# EAGLE board FPGA (EAGLE 9.1.3)

Size 277.93 x 208.33 mm. Coordinates in mm from the lower left corner, seen from the top.
Outline: 3.66,200.32 11.66,200.32 11.66,208.32
Outline: 82.18,208.32 82.18,200.32 90.18,200.32 90.18,208.32 95.75,208.32
Outline: 0,63.06 4.01,69.99
Outline: 10.93,65.99 6.93,59.06
Outline: 240.1,156.59 144.8,156.59
Outline: 144.8,156.59 240.1,156.59
Outline: 240.1,156.59 144.8,156.59
Outline: 240.1,156.59 arc-292 144.8,156.59
Copper layers (1+2*15+16): Top 0.035mm / dielectric 0.3mm / Route2 0.09mm / dielectric 0.7mm / Route15 0.09mm / dielectric 0.3mm / Bottom 0.035mm
Design rules "default *": minimum track width 6mil, minimum drill 0.35mm, track to track 6mil, track to pad 6mil, pad to pad 6mil, via to via 6mil, smd to smd 6mil, copper to edge 40mil, drill to drill 6mil, minimum pad ring 10mil, minimum via ring 8mil, stop-mask expansion 4mil, vias tented up to drill 0mil, thermal gap 10mil
Net classes: 0 signal1: width 0.3 mm, drill 0.4 mm, clearance 0.2 mm; 1 5v: width 0.4 mm, drill 0.4 mm, clearance 0.2 mm; 2 18V: width 1.2 mm, drill 1.3 mm, clearance 0.2 mm; 3 signal: width 0.3 mm, drill 0.4 mm, clearance 0.2 mm; 4 gnd: width 0.3 mm, drill 0.4 mm, clearance 0.2 mm; 5 VCKT: width 4 mm, drill 4 mm, clearance 0.2 mm; 6 motor: width 0.8 mm, drill 1 mm, clearance 0.2 mm
Holes 3.2 mm at -24.96,94.83 26.41,57.03 67.09,57.03 118.8,94.83 -8.97,197.69 -24.96,177.83 102.81,197.69 118.8,177.83

## Footprints (pad centres in the part's own frame; a part is rotated, then mirrored left to right if it is on the bottom)
C1206 = smd 1.6 x 1.8: 1 -1.4,0; 2 1.4,0
TO220H = drill 1.118 long: 1 -2.54,-10.16; 2 0,-10.16; 3 2.54,-10.16 | hole 3.302: 0,4.826
2X5-SHROUDED_LOCK = drill 1.016 pad 1.88: 1 -1.397,5.08; 2 1.397,5.08; 3 -1.397,2.54; 4 1.397,2.54; 5 -1.397,0; 6 1.397,0; 7 -1.397,-2.54; 8 1.397,-2.54; 9 -1.397,-5.08; 10 1.397,-5.08
XT-60 = drill 4.7 square: BATT 0,4.154; GND 0,11.092
2X20 = drill 1.016 octagon: 1 -24.13,-1.27; 2 -24.13,1.27; 3 -21.59,-1.27; 4 -21.59,1.27; 5 -19.05,-1.27; 6 -19.05,1.27; 7 -16.51,-1.27; 8 -16.51,1.27; 9 -13.97,-1.27; 10 -13.97,1.27; 11 -11.43,-1.27; 12 -11.43,1.27; 13 -8.89,-1.27; 14 -8.89,1.27; 15 -6.35,-1.27; 16 -6.35,1.27; 17 -3.81,-1.27; 18 -3.81,1.27; 19 -1.27,-1.27; 20 -1.27,1.27; 21 1.27,-1.27; 22 1.27,1.27; 23 3.81,-1.27; 24 3.81,1.27; 25 6.35,-1.27; 26 6.35,1.27; 27 8.89,-1.27; 28 8.89,1.27; 29 11.43,-1.27; 30 11.43,1.27; 31 13.97,-1.27; 32 13.97,1.27; 33 16.51,-1.27; 34 16.51,1.27; 35 19.05,-1.27; 36 19.05,1.27; 37 21.59,-1.27; 38 21.59,1.27; 39 24.13,-1.27; 40 24.13,1.27
1206 = smd 1.6 x 1.803: A -1.422,0; C 1.422,0
R1206 = smd 1.6 x 1.803: 1 -1.422,0; 2 1.422,0
MA08-1 = drill 1.016 long: 1 -8.89,0; 2 -6.35,0; 3 -3.81,0; 4 -1.27,0; 5 1.27,0; 6 3.81,0; 7 6.35,0; 8 8.89,0
MA10-1 = drill 1.016 long: 1 -11.43,0; 2 -8.89,0; 3 -6.35,0; 4 -3.81,0; 5 -1.27,0; 6 1.27,0; 7 3.81,0; 8 6.35,0; 9 8.89,0; 10 11.43,0
TO228P1042X238-3N = smd 0.889 x 1.219: 1 -2.286,-6.502; 3 2.286,-6.502 | smd 6.731 x 6.502: 2 0,0.152
NODEMCU32 = drill 0.8 long: P$1 0,0; P$2 0,-2.54; P$3 0,-5.08; P$4 0,-7.62; P$5 0,-10.16; P$6 0,-12.7; P$7 0,-15.24; P$8 0,-17.78; P$9 0,-20.32; P$10 0,-22.86; P$11 0,-25.4; P$12 0,-27.94; P$13 0,-30.48; P$14 0,-33.02; P$15 0,-35.56; P$16 0,-38.1; P$17 0,-40.64; P$18 0,-43.18; P$19 0,-45.72; P$20 22.86,0; P$21 22.86,-2.54; P$22 22.86,-5.08; P$23 22.86,-7.62; P$24 22.86,-10.16; P$25 22.86,-12.7; P$26 22.86,-15.24; P$27 22.86,-17.78; P$28 22.86,-20.32; P$29 22.86,-22.86; P$30 22.86,-25.4; P$31 22.86,-27.94; P$32 22.86,-30.48; P$33 22.86,-33.02; P$34 22.86,-35.56; P$35 22.86,-38.1; P$36 22.86,-40.64; P$37 22.86,-43.18; P$38 22.86,-45.72
BUCK = drill 1.016 pad 1.778 octagon: GND 0,0; GNDO 39,0; VIN 0,17.5; VOUT 39,17.5
DA10 = drill 5.08 pad 5.334 long: P$1 0,0; P$2 -7.048,0

## Placement (x,y rotation side)
C1  47uF  [C1206]  519.29,-239.57 90 top  (outside the outline)
C3  47uF  [C1206]  521.83,-245.92 180 top  (outside the outline)
C4  47uF  [C1206]  521.83,-257.35 180 top  (outside the outline)
C5  47uF  [C1206]  525.64,-231.95 180 top  (outside the outline)
IC1  7805T  [TO220H]  537.07,-252.27 90 bottom  (outside the outline)
IC2  7805T  [TO220H]  537.07,-238.3 90 bottom  (outside the outline)
J1  [2X5-SHROUDED_LOCK]  142.45,85.59 90 bottom
J2  [2X5-SHROUDED_LOCK]  242.45,85.59 90 bottom
J3  [2X5-SHROUDED_LOCK]  152.45,25.59 90 bottom
J4  [2X5-SHROUDED_LOCK]  232.45,25.59 90 bottom
J5  XT-60BATT_LABEL  [XT-60]  159.06,149.47 270 bottom
JP1  [2X20]  165.27,77.59 270 top
JP2  [2X20]  219.63,77.59 270 top
LED1  [1206]  -24.28,-300.46 0 top  (outside the outline)
LED2  [1206]  -24.28,-304.58 0 top  (outside the outline)
LED3  [1206]  -24.28,-312.82 0 top  (outside the outline)
LED4  [1206]  -24.28,-321.06 0 top  (outside the outline)
LED5  [1206]  -24.28,-329.3 0 top  (outside the outline)
LED6  [1206]  -24.28,-337.54 0 top  (outside the outline)
LED7  [1206]  -24.28,-345.78 0 top  (outside the outline)
R1  [R1206]  -24.11,-296.34 0 top  (outside the outline)
R2  [R1206]  -24.11,-308.7 0 top  (outside the outline)
R3  [R1206]  -24.11,-316.94 0 top  (outside the outline)
R4  [R1206]  -24.11,-325.18 0 top  (outside the outline)
R5  [R1206]  -24.11,-333.42 0 top  (outside the outline)
R6  [R1206]  -24.11,-341.66 0 top  (outside the outline)
R7  [R1206]  -24.11,-349.9 0 top  (outside the outline)
SV1  [MA08-1]  142.45,94.59 0 bottom
SV2  [MA08-1]  152.45,34.59 0 bottom
SV3  [MA08-1]  242.45,94.59 0 bottom
SV4  [MA08-1]  232.45,34.59 0 bottom
SV5  [MA08-1]  192.45,15.59 0 bottom
SV7  [MA08-1]  142.45,130.59 180 top
SV8  [MA10-1]  142.45,104.59 180 top
SV9  [MA08-1]  242.45,70.59 180 top
SV10  [MA10-1]  242.45,44.59 180 top
SV11  [MA08-1]  142.45,70.59 180 top
SV12  [MA10-1]  142.45,44.59 180 top
SV14  [MA10-1]  192.45,106.59 180 top
SV15  [MA08-1]  242.45,130.59 180 top
SV16  [MA10-1]  242.45,104.59 180 top
SV17  [MA08-1]  192.45,132.59 180 top
SV18  [MA08-1]  212.75,120.16 90 bottom
U1  [TO228P1042X238-3N]  184.9,143.01 180 top
U2  [TO228P1042X238-3N]  176.52,143.16 180 top
U3  [TO228P1042X238-3N]  168.34,143.27 180 top
U$1  NODEMCU32S  [NODEMCU32]  203.95,88.1 0 bottom
U$4  BUCK  [BUCK]  56.31,146.43 0 top
U$5  [DA10]  -16.41,-286.67 0 top  (outside the outline)

## Library data of the parts
C1 C3-C5 = rcl
IC1 IC2 = linear
J1-J4 = SparkFun-Connectors; PROD_ID: CONN-08671; SF_ID: PRT-08506
J5 = RoboJackets-Connectors
JP1 JP2 = pinhead
LED1-LED7 = led
R1-R7 = resistor
SV1-SV5 SV7-SV12 SV14-SV18 = con-lstb; OC_FARNELL: unknown; OC_NEWARK: unknown
U1-U3 = LP38690DT-3.3; MPN: LP38690DT-3.3; OC_FARNELL: 1008048; OC_NEWARK: 41K7439; PACKAGE: TO-252; SUPPLIER: National Semiconductor
U$1 = nodeMCU
U$4 = BUCK
U$5 = switch_DA10

## Nets
5V [5v]: C3.1 IC1.3 J1.2 J2.2 J3.2 J4.2 R2.1 SV1.5 SV2.5 SV3.5 SV4.5 SV17.1 SV18.5
5V1: C5.1 IC2.3 R1.1 SV7.1 SV9.1 SV11.1 SV15.1 U$1.P$20
12V: C1.1 C4.1 IC1.1 IC2.1 R4.1 SV14.9 SV14.10 U$4.VOUT
18V [18V]: R3.1 SV8.9 SV8.10 SV10.9 SV10.10 SV12.9 SV12.10 SV16.9 SV16.10 U1.2 U2.2 U3.2 U$4.VIN
CHARGE: JP2.16 SV5.1
DONE: JP2.18 SV5.2
ESP_EN: JP2.25 U$1.P$37
ESP_REC: R7.1 U$1.P$33
ESP_RX: JP2.21 U$1.P$15
ESP_TRANS: R6.1 U$1.P$34
ESP_TX: JP2.23 U$1.P$16
FPGA_REC: JP1.22 R5.1
GND [gnd]: C1.2 C3.2 C4.2 C5.2 IC1.2 IC2.2 J1.3 J2.3 J3.3 J4.3 J5.GND JP1.1 JP1.39 JP2.2 JP2.40 LED1.C LED2.C LED3.C LED4.C LED5.C LED6.C LED7.C SV1.4 SV2.4 SV3.4 SV4.4 SV5.8 SV8.1 SV8.2 SV10.1 SV10.2 SV12.1 SV12.2 SV14.1 SV14.2 SV16.1 SV16.2 SV18.4 U$1.P$13 U$1.P$19 U$1.P$21 U$1.P$25 U$4.GND U$4.GNDO
INPUT [VCKT]: U1.1 U1.3 U2.1 U2.3 U3.1 U3.3 U$5.P$1
IR1: JP2.24 SV5.7
IR2: JP2.26 SV5.6
IR3 [gnd]: JP2.15 SV5.5
KICK: JP2.20 SV5.4
KICK_CHIP: JP2.22 SV5.3
M1ACS_OUT: SV7.8
M1EA: J1.6 JP1.4
M1EB: J1.8 JP1.6
M1H1: JP1.8 SV1.3
M1H2: JP1.10 SV1.2
M1H3: JP1.12 SV1.1
M2ACS_OUT: SV11.8
M2EA: J2.6 JP1.30
M2EB: J2.8 JP1.32
M2H1: JP1.34 SV2.3
M2H2: JP1.36 SV2.2
M2H3: JP1.38 SV2.1
M3ACS_OUT: SV15.8
M3EA: J3.6 JP2.3
M3EB: J3.8 JP2.5
M3H1: JP2.7 SV3.3
M3H2: JP2.9 SV3.2
M3H3: JP2.11 SV3.1
M4ACS_OUT: SV9.8
M4EA: J4.6 JP2.29
M4EB: J4.8 JP2.31
M4H1: JP2.33 SV4.3
M4H2: JP2.35 SV4.2
M4H3: JP2.37 SV4.1
M11: SV1.8 SV7.6 SV7.7
M11A [signal]: JP1.3 SV8.8
M11B [signal]: JP1.5 SV8.7
M12: SV1.7 SV7.4 SV7.5
M12A: JP1.7 SV8.6
M12B: JP1.9 SV8.5
M13: SV1.6 SV7.2 SV7.3
M13A: JP1.11 SV8.4
M13B: JP1.13 SV8.3
M21: SV2.8 SV11.6 SV11.7
M21A: JP1.27 SV12.8
M21B: JP1.29 SV12.7
M22: SV2.7 SV11.4 SV11.5
M22A: JP1.31 SV12.6
M22B: JP1.33 SV12.5
M23: SV2.6 SV11.2 SV11.3
M23A: JP1.35 SV12.4
M23B: JP1.37 SV12.3
M31 [motor]: SV3.8 SV15.6 SV15.7
M31A: JP2.4 SV16.8
M31B: JP2.6 SV16.7
M32 [motor]: SV3.7 SV15.4 SV15.5
M32A: JP2.8 SV16.6
M32B: JP2.10 SV16.5
M33 [motor]: SV3.6 SV15.2 SV15.3
M33A: JP2.12 SV16.4
M33B: JP2.14 SV16.3
M41: SV4.8 SV9.6 SV9.7
M41A: JP2.28 SV10.8
M41B: JP2.30 SV10.7
M42: SV4.7 SV9.4 SV9.5
M42A: JP2.32 SV10.6
M42B: JP2.34 SV10.5
M43: SV4.6 SV9.2 SV9.3
M43A: JP2.36 SV10.4
M43B: JP2.38 SV10.3
MD1: SV17.6 SV17.7 SV18.8
MD1A: JP1.15 SV14.8
MD1B: JP1.17 SV14.7
MD2: SV17.4 SV17.5 SV18.7
MD2A: JP1.19 SV14.6
MD2B: JP1.21 SV14.5
MD3: SV17.2 SV17.3 SV18.6
MD3A: JP1.23 SV14.4
MD3B: JP1.25 SV14.3
MDACS_OUT: SV17.8
MDH1: JP1.16 SV18.3
MDH2: JP1.18 SV18.2
MDH3: JP1.20 SV18.1
N$1: J5.BATT U$5.P$2
N$2: U$1.P$17
N$4: LED1.A R1.2
N$7: LED2.A R2.2
N$10: LED3.A R3.2
N$13: LED4.A R4.2
N$16: LED5.A R5.2
N$19: LED6.A R6.2
N$22: LED7.A R7.2

## Tracks (layer width: path | path; a pad name or v marks a point on that pad's centre or on a via)
5V  (12 unrouted)
5V1  (7 unrouted)
12V  (7 unrouted)
18V  (12 unrouted)
CHARGE  (1 unrouted)
DONE  (1 unrouted)
ESP_EN  (1 unrouted)
ESP_REC  (1 unrouted)
ESP_RX  (1 unrouted)
ESP_TRANS  (1 unrouted)
ESP_TX  (1 unrouted)
FPGA_REC  (1 unrouted)
GND  (43 unrouted)
INPUT  (6 unrouted)
IR1  (1 unrouted)
IR2  (1 unrouted)
IR3  (1 unrouted)
KICK  (1 unrouted)
KICK_CHIP  (1 unrouted)
M1EA  (1 unrouted)
M1EB  (1 unrouted)
M1H1  (1 unrouted)
M1H2  (1 unrouted)
M1H3  (1 unrouted)
M2EA  (1 unrouted)
M2EB  (1 unrouted)
M2H1  (1 unrouted)
M2H2  (1 unrouted)
M2H3  (1 unrouted)
M3EA  (1 unrouted)
M3EB  (1 unrouted)
M3H1  (1 unrouted)
M3H2  (1 unrouted)
M3H3  (1 unrouted)
M4EA  (1 unrouted)
M4EB  (1 unrouted)
M4H1  (1 unrouted)
M4H2  (1 unrouted)
M4H3  (1 unrouted)
M11  (2 unrouted)
M11A  (1 unrouted)
M11B  (1 unrouted)
M12  (2 unrouted)
M12A  (1 unrouted)
M12B  (1 unrouted)
M13  (2 unrouted)
M13A  (1 unrouted)
M13B  (1 unrouted)
M21  (2 unrouted)
M21A  (1 unrouted)
M21B  (1 unrouted)
M22  (2 unrouted)
M22A  (1 unrouted)
M22B  (1 unrouted)
M23  (2 unrouted)
M23A  (1 unrouted)
M23B  (1 unrouted)
M31  (2 unrouted)
M31A  (1 unrouted)
M31B  (1 unrouted)
M32  (2 unrouted)
M32A  (1 unrouted)
M32B  (1 unrouted)
M33  (2 unrouted)
M33A  (1 unrouted)
M33B  (1 unrouted)
M41  (2 unrouted)
M41A  (1 unrouted)
M41B  (1 unrouted)
M42  (2 unrouted)
M42A  (1 unrouted)
M42B  (1 unrouted)
M43  (2 unrouted)
M43A  (1 unrouted)
M43B  (1 unrouted)
MD1  (2 unrouted)
MD1A  (1 unrouted)
MD1B  (1 unrouted)
MD2  (2 unrouted)
MD2A  (1 unrouted)
MD2B  (1 unrouted)
MD3  (2 unrouted)
MD3A  (1 unrouted)
MD3B  (1 unrouted)
MDH1  (1 unrouted)
MDH2  (1 unrouted)
MDH3  (1 unrouted)
N$1  (1 unrouted)
N$4  (1 unrouted)
N$7  (1 unrouted)
N$10  (1 unrouted)
N$13  (1 unrouted)
N$16  (1 unrouted)
N$19  (1 unrouted)
N$22  (1 unrouted)